# EAGLE board Trackpad (EAGLE 9.2.0)
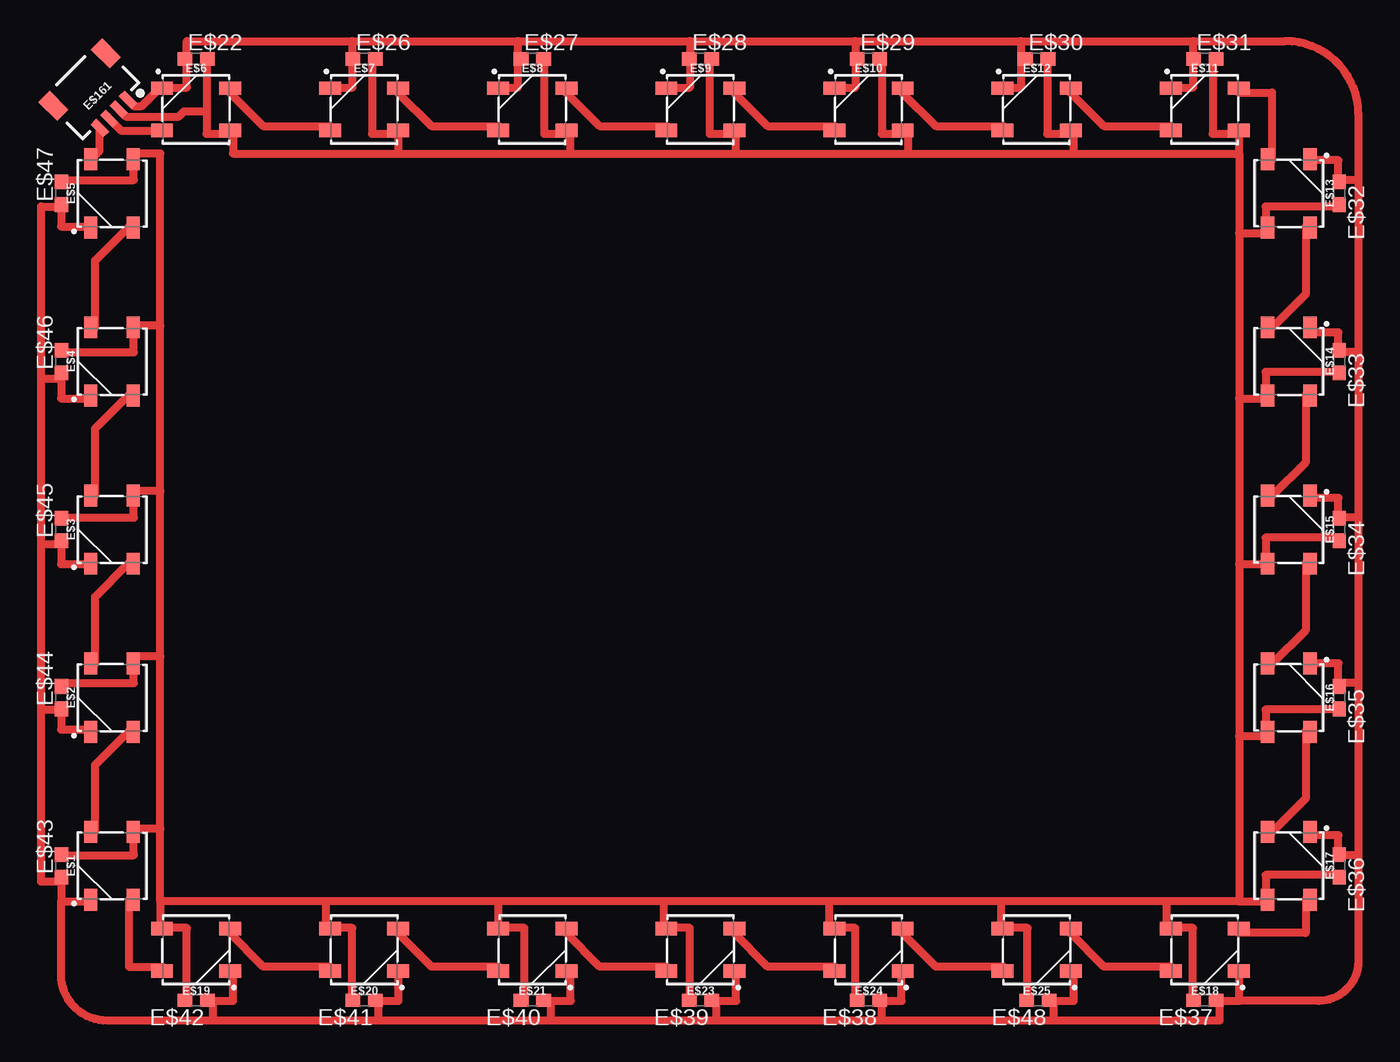
[diagram p0: board, top side]

No outline drawn. Coordinates in mm, seen from the top.
Copper layers (1*16): Top 0.035mm / dielectric 1.5mm / Bottom 0.035mm
Design rules "default": minimum track width 6mil, minimum drill 0.35mm, track to track 6mil, track to pad 6mil, pad to pad 6mil, via to via 6mil, smd to smd 6mil, copper to edge 40mil, drill to drill 6mil, minimum pad ring 10mil, minimum via ring 8mil, stop-mask expansion 4mil, vias tented up to drill 0mil, thermal gap 10mil

## Footprints (pad centres in the part's own frame; a part is rotated, then mirrored left to right if it is on the bottom)
WS2812B = smd 1.651 x 1: 1 2.577,-1.6; 2 2.577,1.6; 3 -2.577,1.6; 4 -2.577,-1.6
C0603 = smd 1.1 x 1: 1 -0.85,0; 2 0.85,0
1X04_1MM_RA = smd 0.6 x 1.35: 1 -1.5,0; 2 -0.5,0; 3 0.5,0; 4 1.5,0 | smd 1.2 x 2: NC1 2.8,-3.675; NC2 -2.8,-3.675

## Placement (x,y rotation side)
E$1  [WS2812B]  6.35,12.7 90 top
E$2  [WS2812B]  6.35,25.4 90 top
E$3  [WS2812B]  6.35,38.1 90 top
E$4  [WS2812B]  6.35,50.8 90 top
E$5  [WS2812B]  6.35,63.5 90 top
E$6  [WS2812B]  12.7,69.85 0 top
E$7  [WS2812B]  25.4,69.85 0 top
E$8  [WS2812B]  38.1,69.85 0 top
E$9  [WS2812B]  50.8,69.85 0 top
E$10  [WS2812B]  63.5,69.85 0 top
E$11  [WS2812B]  88.9,69.85 0 top
E$12  [WS2812B]  76.2,69.85 0 top
E$13  [WS2812B]  95.25,63.5 270 top
E$14  [WS2812B]  95.25,50.8 270 top
E$15  [WS2812B]  95.25,38.1 270 top
E$16  [WS2812B]  95.25,25.4 270 top
E$17  [WS2812B]  95.25,12.7 270 top
E$18  [WS2812B]  88.9,6.35 180 top
E$19  [WS2812B]  12.7,6.35 180 top
E$20  [WS2812B]  25.4,6.35 180 top
E$21  [WS2812B]  38.1,6.35 180 top
E$22  [C0603]  12.7,73.66 0 top
E$23  [WS2812B]  50.8,6.35 180 top
E$24  [WS2812B]  63.5,6.35 180 top
E$25  [WS2812B]  76.2,6.35 180 top
E$26  [C0603]  25.4,73.66 0 top
E$27  [C0603]  38.1,73.66 0 top
E$28  [C0603]  50.8,73.66 0 top
E$29  [C0603]  63.5,73.66 0 top
E$30  [C0603]  76.2,73.66 0 top
E$31  [C0603]  88.9,73.66 0 top
E$32  [C0603]  99.06,63.5 270 top
E$33  [C0603]  99.06,50.8 270 top
E$34  [C0603]  99.06,38.1 270 top
E$35  [C0603]  99.06,25.4 270 top
E$36  [C0603]  99.06,12.7 270 top
E$37  [C0603]  88.9,2.54 180 top
E$38  [C0603]  63.5,2.54 180 top
E$39  [C0603]  50.8,2.54 180 top
E$40  [C0603]  38.1,2.54 180 top
E$41  [C0603]  25.4,2.54 180 top
E$42  [C0603]  12.7,2.54 180 top
E$43  [C0603]  2.54,12.7 90 top
E$44  [C0603]  2.54,25.4 90 top
E$45  [C0603]  2.54,38.1 90 top
E$46  [C0603]  2.54,50.8 90 top
E$47  [C0603]  2.54,63.5 90 top
E$48  [C0603]  76.3,2.54 180 top
E$161  [1X04_1MM_RA]  6.5,69.5 225 top

## Library data of the parts
E$1-E$21 E$23-E$25 = SparkFun-LED
E$22 E$26-E$48 = eagle-ltspice
E$161 = SparkFun-Connectors

## Tracks (layer width: path | path; a pad name or v marks a point on that pad's centre or on a via)
S$1
  Top 0.61: 15.24,71.12 17.78,68.58 22.86,68.58
S$2
  Top 0.61: 27.94,71.12 30.48,68.58 35.56,68.58
S$3
  Top 0.61: 40.64,71.12 43.18,68.58 48.26,68.58
S$4
  Top 0.61: 53.34,71.12 55.88,68.58 60.96,68.58
S$5
  Top 0.61: 66.04,71.12 68.58,68.58 73.66,68.58
S$6
  Top 0.61: 78.74,71.12 81.28,68.58 86.36,68.58
S$7
  Top 0.61: 91.44,71.12 93.98,71.12 93.98,66.04
S$8
  Top 0.61: 96.52,60.96 96.52,55.88 93.98,53.34
S$9
  Top 0.61: 96.52,48.26 96.52,43.18 93.98,40.64
S$10
  Top 0.61: 96.52,35.56 96.52,30.48 93.98,27.94
S$11
  Top 0.61: 96.52,22.86 96.52,17.78 93.98,15.24
S$12
  Top 0.61: 96.52,10.16 96.52,7.62 91.44,7.62
S$13
  Top 0.61: 86.36,5.08 81.28,5.08 78.74,7.62
S$14
  Top 0.61: 73.66,5.08 68.58,5.08 66.04,7.62
S$15
  Top 0.61: 60.96,5.08 55.88,5.08 53.34,7.62
S$16
  Top 0.61: 48.26,5.08 43.18,5.08 40.64,7.62
S$17
  Top 0.61: 35.56,5.08 30.48,5.08 27.94,7.62
S$18
  Top 0.61: 22.86,5.08 17.78,5.08 15.24,7.62
S$19
  Top 0.61: 7.62,10.16 7.62,5.08 10.16,5.08
S$20
  Top 0.61: 5.08,15.24 5.08,20.32 7.62,22.86
S$21
  Top 0.61: 5.08,27.94 5.08,33.02 7.62,35.56
S$22
  Top 0.61: 5.08,40.64 5.08,45.72 7.62,48.26
S$23
  Top 0.61: 5.08,53.34 5.08,58.42 7.62,60.96
S$24
  Top 0.61: 5.4,68.4 5.4,66.7 4.8,66.1
S$25
  Top 0.61: 10.2,68.2 7.1,68.2 6,69.3
VDD
  Top 0.61: 13.5,73.5 13.5,69.7 | 13.5,69.7 13.5,68 15.5,68 15.5,66.5 28,66.5 | 26,73.5 26,68 28,68 28,66.5 | 39,73.5 39,68 41,68 41,66.5 | 28,66.5 41,66.5 | 51.5,73.5 51.5,68 53.5,68 53.5,66.5 | 41,66.5 53.5,66.5 | 64.5,73.5 64.5,68 66.5,68 66.5,66.5 | 53.5,66.5 66.5,66.5 | 77,73.5 77,68 79,68 79,66.5 | 66.5,66.5 79,66.5 | 89.5,73.5 89.5,68 91.5,68 91.5,66.5 | 79,66.5 91.5,66.5 | 99,62.5 93.5,62.5 93.5,60.5 91.5,60.5 | 91.5,66.5 91.5,60.5 | 99,50 93.5,50 93.5,48 91.5,48 | 91.5,60.5 91.5,48 | 99,37.5 93.5,37.5 93.5,35.5 91.5,35.5 | 91.5,48 91.5,35.5 | 99,24.5 93.5,24.5 93.5,22.5 91.5,22.5 | 91.5,35.5 91.5,22.5 | 99,12 93.5,12 93.5,10 91.5,10 | 91.5,22.5 91.5,10 | 88,2.5 88,8 86,8 86,10 | 91.5,10 86,10 | 75.5,2.5 75.5,8 73.5,8 73.5,10 | 86,10 73.5,10 | 62.5,2.5 62.5,8 60.5,8 60.5,10 | 73.5,10 60.5,10 | 50,2.5 50,8 48,8 48,10 | 60.5,10 48,10 | 37.5,2.5 37.5,8 35.5,8 35.5,10 | 48,10 35.5,10 | 24.5,2.5 24.5,8 22.5,8 22.5,10 | 35.5,10 22.5,10 | 12,2.5 12,8 10,8 10,10 | 22.5,10 10,10 | 2.5,13.5 8,13.5 8,15.5 10,15.5 | 10,10 10,15.5 | 2.5,26.5 8,26.5 8,28.5 10,28.5 | 10,15.5 10,28.5 | 2.5,39 8,39 8,41 10,41 | 10,28.5 10,41 | 2.5,51.5 8,51.5 8,53.5 10,53.5 | 10,41 10,53.5 | 2.5,64.5 8,64.5 8,66.5 10,66.5 10,53.5 | 6.9,69.8 7.4,69.3 11.4,69.3 11.8,69.7 13.5,69.7
VSS
  Top 0.61: 23,71.5 24.5,71.5 24.5,75 | 24.5,75 12,75 12,71.5 10,71.5 8.6,70.1 8,70.1 7.6,70.5 | 35.5,71.5 37,71.5 37,75 | 24.5,75 37,75 | 48.5,71.5 50,71.5 50,75 | 37,75 50,75 | 61,71.5 62.5,71.5 62.5,75 | 50,75 62.5,75 | 73.5,71.5 75,71.5 75,75 | 62.5,75 75,75 | 86.5,71.5 88,71.5 88,75 | 75,75 88,75 | 88,75 95,75 arc-90 100.5,69.5 100.5,64.5 | 97,66 99,66 99,64.5 100.5,64.5 | 97,53 99,53 99,51.5 100.5,51.5 | 100.5,64.5 100.5,51.5 | 97,40.5 99,40.5 99,39 100.5,39 | 100.5,51.5 100.5,39 | 97,28 99,28 99,26.5 100.5,26.5 | 100.5,39 100.5,26.5 | 97,15 99,15 99,13.5 100.5,13.5 | 100.5,26.5 100.5,13.5 | 100.5,13.5 100.5,5.5 arc-90 97.5,2.5 91.5,2.5 | 91.5,2.5 90,2.5 90,1 77.5,1 | 91.5,2.5 91.5,4.5 | 79,4.5 79,2.5 77.5,2.5 77.5,1 | 66,4.5 66,2.5 64.5,2.5 64.5,1 | 77.5,1 64.5,1 | 53.5,4.5 53.5,2.5 52,2.5 52,1 | 64.5,1 52,1 | 41,4.5 41,2.5 39.5,2.5 39.5,1 | 52,1 39.5,1 | 28,4.5 28,2.5 26.5,2.5 26.5,1 | 39.5,1 26.5,1 | 15.5,4.5 15.5,2.5 14,2.5 14,1 | 26.5,1 14,1 | 14,1 6,1 arc-90 2.5,4.5 2.5,10 | 2.5,10 2.5,11.5 1,11.5 1,24.5 | 2.5,10 4.5,10 | 4.5,23 2.5,23 2.5,24.5 1,24.5 | 4.5,35.5 2.5,35.5 2.5,37 1,37 | 1,24.5 1,37 | 4.5,48 2.5,48 2.5,49.5 1,49.5 | 1,37 1,49.5 | 4.5,61 2.5,61 2.5,62.5 1,62.5 1,49.5